# EAGLE board ESP32-Cam-Pico-V4 (EAGLE 9.6.2)
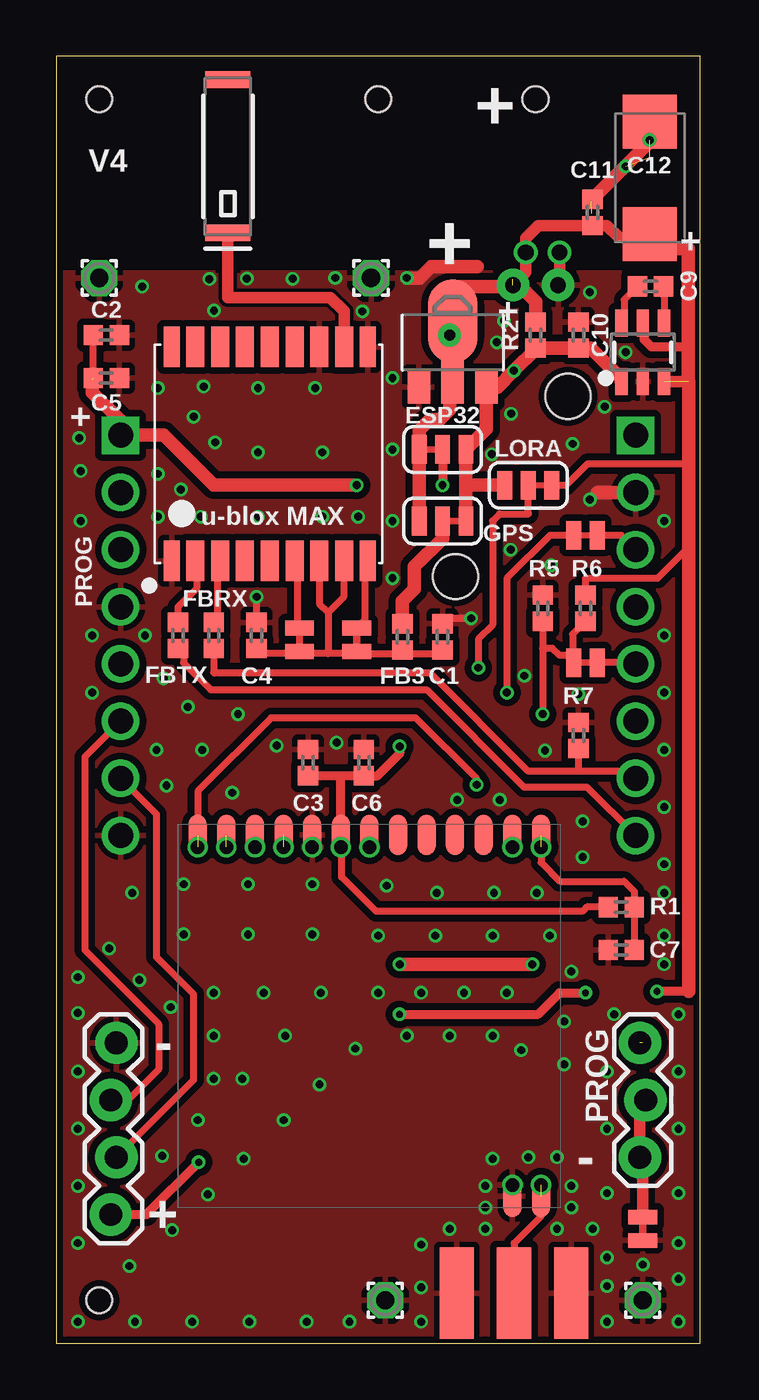
[diagram p0: board, top side]
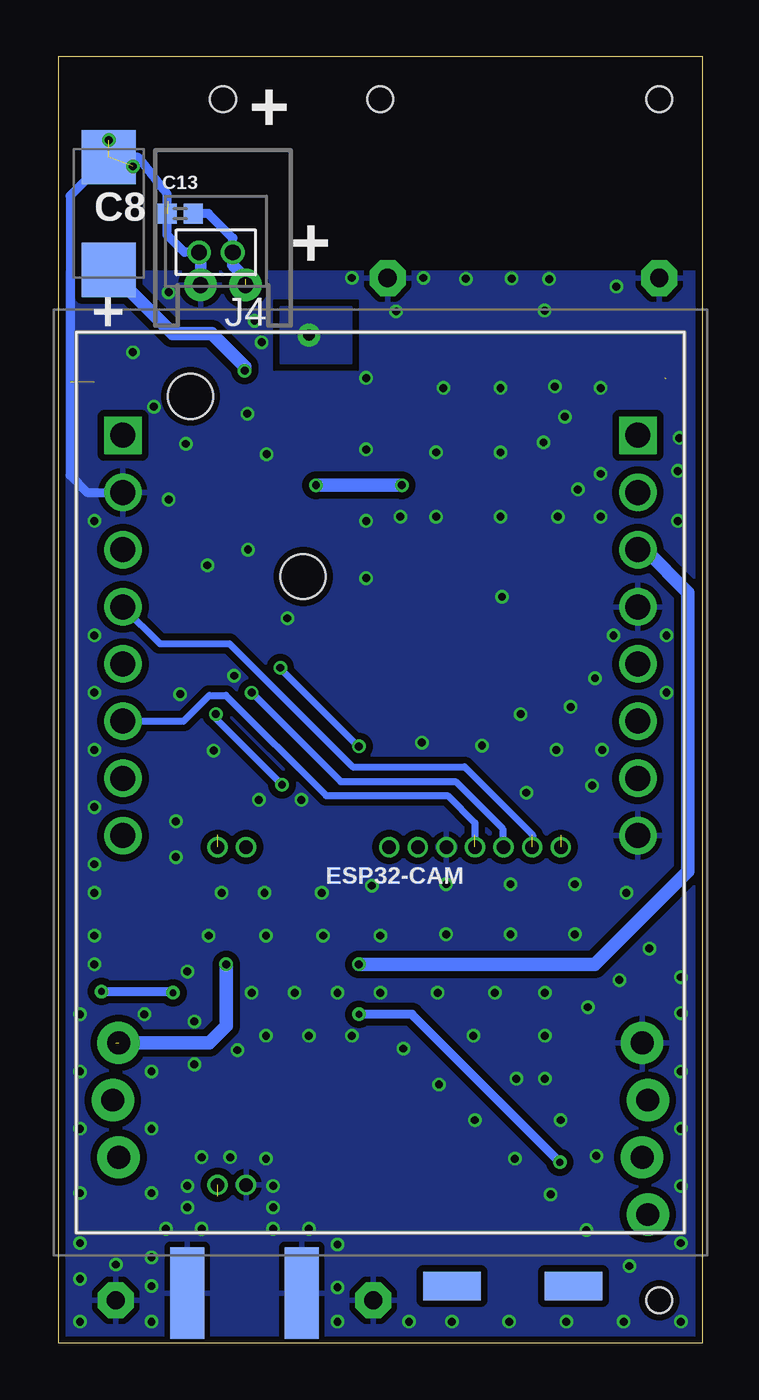
[diagram p1: board, bottom side, seen from below]

Size 28.57 x 57.15 mm. Coordinates in mm from the lower left corner, seen from the top.
Outline: 0,0 28.57,0 28.57,57.15 0,57.15 0,0
Copper layers (1*16): Top 0.035559375mm / dielectric 1.6mm / Bottom 0.035559375mm
Design rules "Arxterra-HLCpcb-2-layer-KW": minimum track width 6mil, minimum drill 0.3mm, track to track 6mil, track to pad 6mil, pad to pad 6mil, via to via 10mil, smd to smd 6mil, copper to edge 8mil, drill to drill 6mil, minimum pad ring 5mil, minimum via ring 3mil, stop-mask expansion 2.5mil, vias tented up to drill 25mil, thermal gap 10mil
Holes 1.15 mm at 1.91,55.24 14.29,55.24 1.91,1.91 21.27,55.24
tKeepout: area 0,47.9 to 28.6,57.5
bKeepout: area 0,47.9 to 28.6,57.5
tRestrict: area 0,47.9 to 28.6,57.5
bRestrict: area 0,47.9 to 28.6,57.5

## Footprints (pad centres in the part's own frame; a part is rotated, then mirrored left to right if it is on the bottom)
0402 = smd 0.85 x 0.9: 1 -0.58,0; 2 0.58,0
SMC_C = smd 2.4 x 2.4: + -2.5,0; - 2.5,0
SMT-JUMPER_3_1-NC_TRACE_SILK = smd 0.66 x 1.27: 1 -1.041,0; 2 0,0; 3 1.041,0
ESP32CAM = drill 1.11 pad 1.665: 1 0,0; 2 0,2.54; 3 0,5.08; 4 0,7.62; 5 0,10.16; 6 0,12.7; 7 0,15.24; 10 22.86,15.24; 11 22.86,12.7; 12 22.86,10.16; 13 22.86,7.62; 14 22.86,5.08; 15 22.86,2.54; 16 22.86,0 | drill 1.11 pad 1.665 square: 8 0,17.78; 9 22.86,17.78 | hole 2: 3,19.508; 8,11.508
SOT89 = smd 1 x 1.5: 1 -1.499,-1.981; 3 1.499,-1.981 | smd 1 x 2: 2 0,-1.727 | smd 2.2 x 3.7: 2@1 0,0.94
JST-2-PTH-KIT = drill 0.7 pad 1.448: 1 -1,0; 2 1,0
1X04_LOCK = drill 1.016 pad 1.88: 1 0,0.127; 2 2.54,-0.127; 3 5.08,0.127; 4 7.62,-0.127
1X03_LOCK = drill 1.016 pad 1.88: 1 0,0.127; 2 2.54,-0.127; 3 5.08,0.127
JST_ZH_2PIN = drill 0.7 pad 1: 1 -0.75,0.45; 2 0.75,0.45
SMA-EDGE = smd 1.524 x 4.064: GND@0 0,0; GND@1 5.08,0; SIG 2.54,0 | smd 1.524 x 4.064 bottom: GND@2 0,0; GND@3 5.08,0
SMT-JUMPER_2_NC_TRACE_NO-SILK = smd 0.66 x 1.27: 1 -0.521,0; 2 0.521,0
1,6/0,8 = drill 0.813 pad 1.6 octagon: 1 0,0
SMD1,27-2,54 = smd 1.27 x 2.54: 1 0,0
SOT23-6 = smd 0.55 x 1.2: 1 0.95,1.3; 2 0,1.3; 3 -0.95,1.3; 4 -0.95,-1.3; 5 0,-1.3; 6 0.95,-1.3
MAX-M8 = smd 1.8 x 0.7: 1_GND 4.95,-4.4; 9_RESET_N 4.95,4.3; 10_GND -4.55,4.3; 18_SAFEBOOT_N -4.55,-4.4 | smd 1.8 x 0.8: 2_TXD 4.95,-3.35; 3_RXD 4.95,-2.25; 4_TIMEPULSE 4.95,-1.15; 5_EXTINT 4.95,-0.05; 6_V_BCKP 4.95,1.05; 7_VCC_IO 4.95,2.15; 8_VCC 4.95,3.25; 11_RF_IN -4.55,3.25; 12_GND -4.55,2.15; 13_LNA_EN -4.55,1.05; 14_VCC_RF -4.55,-0.05; 15_V_ANT/RESERVED -4.55,-1.15; 16_SDA -4.55,-2.25; 17_SCL -4.55,-3.35
ANT-GPS-2X7MM = smd 0.75 x 2: 1 -3.4,0; NC 3.4,0
DRF1278F_2_LESS_PINS = drill 0.6 pad 0.85: 1 16.12,16; 2 14.85,16; 7 8.5,16; 8 7.23,16; 9 5.96,16; 10 4.69,16; 11 3.42,16; 12 2.15,16; 13 0.88,16; 14 14.85,1; 15 16.12,1 | smd 0.8 x 1.8: P1 16.12,16.53; P2 14.85,16.53; P3 13.57,16.53; P4 12.3,16.53; P5 11.04,16.53; P6 9.78,16.53; P7 8.5,16.53; P8 7.23,16.53; P9 5.96,16.53; P10 4.69,16.53; P11 3.42,16.53; P12 2.15,16.53; P13 0.88,16.53; P14 14.85,0.48; P15 16.12,0.48

## Placement (x,y rotation side)
C1  0.1uF  [0402]  17.14,31.37 90 top
C2  0.1uF  [0402]  2.22,44.77 0 top
C3  0.1uF  [0402]  11.18,25.78 90 top
C4  1.0uF  [0402]  8.89,31.43 90 top
C5  1.0uF  [0402]  2.22,42.86 0 top
C6  1.0uF  [0402]  13.65,25.78 90 top
C7  0.1uF  [0402]  25.08,17.46 180 top
C8  220uF  [SMC_C]  26.35,50.16 90 bottom
C9  4.7uF  [0402]  26.38,46.93 0 top
C10  4.7uF  [0402]  23.18,44.77 90 top
C11  4.7uF  [0402]  23.8,50.22 90 top
C12  220uF  [SMC_C]  26.35,51.75 90 top
C13  4.7uF  [0402]  23.18,50.16 180 bottom
ESP32  JUMPER-SMT_3_1-NC_TRACE_SILK  [SMT-JUMPER_3_1-NC_TRACE_SILK]  17.14,39.69 180 top
FB3  FERRITE_BEAD-120_OHM-0402  [0402]  15.37,31.37 90 top
FBRX  FERRITE_BEAD-120_OHM-0402  [0402]  6.99,31.43 270 top
FBTX  FERRITE_BEAD-120_OHM-0402  [0402]  5.4,31.43 270 top
GPS  JUMPER-SMT_3_1-NC_TRACE_SILK  [SMT-JUMPER_3_1-NC_TRACE_SILK]  17.14,36.51 0 top
IC1  ESP32-CAM  [ESP32CAM]  25.72,22.54 0 bottom
IC2  MCP170333MB  [SOT89]  17.6,44.45 0 top
J1  [JST-2-PTH-KIT]  21.27,46.99 0 bottom
J2  [1X04_LOCK]  2.54,13.34 270 top
J3  [1X03_LOCK]  26.04,8.26 90 top
J4  JST_ZH_2PIN  [JST_ZH_2PIN]  21.59,48.9 180 bottom
J$1  SMA_EDGE  [SMA-EDGE]  17.78,2.22 0 top
JP1  JUMPER-SMT_2_NC_TRACE_NO-SILK  [SMT-JUMPER_2_NC_TRACE_NO-SILK]  13.34,31.24 270 top
JP2  JUMPER-SMT_2_NC_TRACE_NO-SILK  [SMT-JUMPER_2_NC_TRACE_NO-SILK]  10.79,31.24 270 top
JP6  JUMPER-SMT_2_NC_TRACE_NO-SILK  [SMT-JUMPER_2_NC_TRACE_NO-SILK]  26.04,5.08 90 top
JP9  JUMPER-SMT_2_NC_TRACE_NO-SILK  [SMT-JUMPER_2_NC_TRACE_NO-SILK]  23.5,35.88 0 top
JP10  JUMPER-SMT_2_NC_TRACE_NO-SILK  [SMT-JUMPER_2_NC_TRACE_NO-SILK]  23.5,30.23 0 top
LORA  JUMPER-SMT_3_1-NC_TRACE_SILK  [SMT-JUMPER_3_1-NC_TRACE_SILK]  20.95,38.1 0 top
PAD1  [1,6/0,8]  1.91,47.31 0 top
PAD2  [1,6/0,8]  13.97,47.31 0 top
PAD3  [1,6/0,8]  14.61,1.91 0 top
PAD4  [1,6/0,8]  26.04,1.91 0 top
PAD5  [SMD1,27-2,54]  11.11,2.54 270 bottom
PAD6  [SMD1,27-2,54]  5.71,2.54 270 bottom
R1  10k  [0402]  25.08,19.37 180 top
R2  0k  [0402]  21.27,44.77 270 top
R5  22k  [0402]  21.59,32.64 270 top
R6  75k  [0402]  23.5,32.64 90 top
R7  22k  [0402]  23.18,26.99 270 top
U1  HX4002  [SOT23-6]  26.04,44.01 180 top
U$1  MAX-M8  [MAX-M8]  9.53,39.69 270 top
U$2  1.575GHz  [ANT-GPS-2X7MM]  7.62,52.7 90 top
U$3  DRF1278F_2LESS_PINS  [DRF1278F_2_LESS_PINS]  5.4,6.03 0 top

## Library data of the parts
C1-C3 C7 = SparkFun-Capacitors; PROD_ID: CAP-14993
C4-C6 C9-C11 C13 = SparkFun-Capacitors; PROD_ID: CAP-12417
C8 C12 = rcl; SPICEPREFIX: C
ESP32 GPS JP1 JP2 JP6 JP9 JP10 LORA = SparkFun-Jumpers
FB3 FBRX FBTX = SparkFun-Coils; MFG_PART: BLM15HB121SN1D; PROD_ID: NDUC-14206
IC1 = ESP32-CAM; DESCRIPTION: Modules PCBA Module RoHS; HEIGHT: 5mm; MANUFACTURER_NAME: Ai-Thinker; MANUFACTURER_PART_NUMBER: ESP32-CAM
IC2 = linear
J1 J3 = SparkFun-Connectors
J2 = SparkFun-Connectors; PROD_ID: CONN-09696
J4 = kanflo
J$1 = SparkFun-Retired
PAD1-PAD6 = wirepad
R1 R2 R5-R7 = SparkFun-Resistors; PROD_ID: RES-14241
U1 = KEW_HF_V13a
U$1 = ubloxLib
U$2 = SparkFun-GPS; PROD_ID: ANT-09087; SF_ID: GPS-09131
U$3 = DRF1278F

## Nets
3.3V: C8.+ C10.1 ESP32.1 GPS.3 IC2.3 LORA.1 R2.2 U1.1
ANT: J$1.SIG U$3.15 U$3.P15
GND: C1.2 C2.2 C3.2 C4.2 C5.2 C6.2 C7.2 C8.- C10.2 C11.2 C12.- C13.2 IC1.7 IC1.12 IC1.16 IC2.1 J1.1 J2.1 J4.2 J$1.GND@0 J$1.GND@1 J$1.GND@2 J$1.GND@3 JP6.1 PAD1.1 PAD2.1 PAD3.1 PAD4.1 R5.1 R7.1 U1.2 U$1.1_GND U$1.10_GND U$1.12_GND U$3.9 U$3.14 U$3.P9 U$3.P14
GPS_RXD: FBRX.2 IC1.2 R7.2
GPS_TXD: FBTX.2 IC1.1
MISO: JP9.1 U$3.11 U$3.P11
MOSI: IC1.5 U$3.12 U$3.P12
N$1: U$1.11_RF_IN U$2.1
N$2: FBRX.1 U$1.3_RXD
N$3: FBTX.1 U$1.2_TXD
N$5: JP1.1 U$1.9_RESET_N
N$6: JP2.1 U$1.6_V_BCKP
N$8: C7.1 R1.1 U$3.1 U$3.P1
N$9: FB3.2 GPS.2
N$11: C1.1 C4.1 FB3.1 JP1.2 JP2.2 U$1.7_VCC_IO U$1.8_VCC
N$12: C9.2 U1.4
N$15: J3.1 J3.2 JP6.2
N$17: C9.1 U1.6
N$18: IC1.6 JP9.2
N$20: IC1.4 JP10.2
NSS: JP10.1 R5.2 R6.1 U$3.13 U$3.P13
PROG: IC1.11 J3.3
RX: IC1.14 J2.2
S+: C3.1 C6.1 C11.1 C12.+ C13.1 ESP32.3 GPS.1 IC2.2@1 J1.2 J2.4 J4.1 LORA.2 LORA.3 R1.2 R2.1 R6.2 U1.3 U1.5 U$3.8 U$3.P8
SCK: IC1.3 U$3.10 U$3.P10
TX: IC1.15 J2.3
V: C2.1 C5.1 ESP32.2 IC1.9

## Tracks (layer width: path | path; a pad name or v marks a point on that pad's centre or on a via)
3.3V  (via drill 0.35 pad 0.6)
  Top 0.152: GPS.3 18.19,36.96
  Top 0.61: 23.18,44.15 C10.1 | U1.1 25.09,42.83 23.73,44.19 C10.1 | 18.19,38.1 ESP32.1 19.09,40.6 IC2.3 19.6,42.47 v20.31,43.19 21.27,44.15 R2.2 C10.1 | 18.19,36.96 18.19,38.1 | 18.19,38.1 LORA.1
  Bottom 0.61: v20.31,43.19 20.31,43.37 21.77,44.83 23.52,44.83 C8.+
ANT  (1 unrouted)
  Top 0.152: U$3.P15 21.52,6.35
  Top 0.305: 21.52,6.35 21.52,5.64 20.32,4.45 J$1.SIG
GND  (via drill 0.35 pad 0.6)  (3 unrouted)
  Top 0.305: C4.2 v8.89,33.15 | C1.2 17.39,32.19 v18.41,32.19
  Top 0.508: J1.1 22.34,47.06 J4.2
  Top 0.61: 24,37.78 IC1.7 | v15.56,47.31 16.13,47.31 16.64,47.82 18.69,47.82 | 23.72,50.72 C11.2 26.35,53.35 C12.-
  Bottom 0.406: IC1.7 27.3,37.78 28.07,38.54 28.07,50.95 C8.- 25.05,52.66 23.76,51.03 C13.2 23.76,49.21 22.99,48.45 J4.2
  Bottom 0.508: J4.2 22.27,48.38 J1.1
  other vias: 25.27,44.01 21.97,34.54 22.92,39.94 19.33,39.48 20.19,41.27 23.69,46.67 19.88,45.4 19.56,44.45 14.92,42.86 8.95,42.42 4.51,42.42 3.81,46.93 1.02,40.2 14.92,39.69 8.95,39.56 6.1,41.15 4.51,38.61 4.51,36.7 8.95,36.7 14.92,36.51 14.92,33.97 4.76,29.53 1.08,36.51 4.45,26.35 8.06,27.94 9.78,26.54 7.81,24.45 19.68,24.13 23.37,23.18 23.37,21.59 26.99,21.27 26.99,23.81 26.99,26.35 26.99,28.89 26.99,31.43 6.79,47.26 3.37,20 5.08,14.92 2.35,17.53 0.95,14.67 0.95,9.53 0.95,12.06 0.95,6.99 0.95,4.45 0.95,0.95 3.49,0.95 6.03,0.95 8.57,0.95 11.11,0.95 27.62,0.95 24.45,0.95 16.19,0.95 16.19,4.38 23.81,5.08 22.23,5.08 19.05,5.08 22.86,6.99 22.23,8.26 20.95,8.26 19.37,8.19 19.05,6.99 27.62,2.86 27.62,6.67 27.62,9.53 27.62,12.06 27.62,14.61 26.99,16.83 26.99,18.1 22.86,16.51 19.37,18.1 16.83,18.1 14.29,18.1 16.19,15.56 13.27,13.08 11.68,11.49 10.1,9.91 8.32,8.19 6.73,6.6 5.14,5.02 4.7,8.32 6.29,9.91 8.26,11.75 10.16,13.65 11.75,15.56 11.37,18.16 11.37,20.38 6.99,15.56 9.21,15.56 6.99,13.65 6.99,11.75 8.51,18.16 5.65,18.16 5.65,20.38 8.51,20.38 18.1,15.56 14.29,15.56 17.46,13.65 19.43,20 16.89,20 14.67,20.32 21.34,20 17.79,24.13 12.45,26.67 6.48,26.35 5.84,28.26 4.89,24.77 20.17,35.24 11.81,36.7 6.41,36.7 11.49,42.42 6.54,42.48 11.81,39.56 24.45,12.06 17.46,5.08 26.99,20 24.77,14.61 21.91,18.1 3.24,3.43 13.02,0.95 26.99,36.51 23.69,37.47 23.18,28.83 3.68,16.13 13.59,45.82 7,45.86 12.38,47.31 8.46,47.28 10.49,47.27 24.35,41.59 20.78,29.64 21.69,26.31 1.59,31.43 1.59,28.89 19.37,13.65 20,15.56 15.56,13.65 22.54,12.38 24.45,9.53 24.45,6.67 26.04,3.49 24.45,2.54 16.19,2.48 0.95,16.26 3.94,31.43 1.08,38.73 7.05,40.01 5.52,37.91 13.4,36.7 25.27,52.26 27.62,4.45 20.64,13.02 19.05,6.03 22.86,6.03 24.45,3.81 22.54,14.29 26.34,53.43
  pour Top (isolate 0.305, rank 2): 0,57.15 0,0 28.57,0 28.57,57.15
  pour Bottom (isolate 0.305, rank 2): 0,57.15 0,0 28.57,0 28.57,57.15
  pour Top: 5.21,47.5 7.24,45.47 14.48,45.47 12.45,47.5
GPS_RXD
  Top 0.305: FBRX.2 6.99,29.79 7.02,29.75 16.61,29.75 16.61,29.74 20.95,25.4 23.18,25.4 | IC1.2 25.4,25.4 23.18,25.4 | R7.2 23.18,25.4
GPS_TXD
  Top 0.305: FBTX.2 5.65,30.6 5.65,30.22 6.85,29.02 16.43,29.02 20.75,24.7 23.56,24.7 IC1.1
MISO  (via drill 0.35 pad 0.6)
  Top 0.152: U$3.P11 U$3.11
  Top 0.305: JP9.1 21.91,35.88 20,33.97 v20,28.89
  Bottom 0.305: v20,28.89 16.05,24.94 10.95,24.94 8.86,22.86 8.86,22.07 U$3.11
MOSI  (1 unrouted)
  Bottom 0.305: IC1.5 24.08,31.06 20.99,31.06 15.52,25.59 10.55,25.59 7.53,22.57 7.53,22.05 U$3.12
N$1
  Top 0.508: U$1.11_RF_IN 12.78,45.83 12.16,46.44 7.62,46.44 U$2.1
N$2
  Top 0.305: U$1.3_RXD 7.15,34.61 7.15,32.17 FBRX.1
N$3
  Top 0.305: U$1.2_TXD 6.22,34.69 6.22,33.52 5.4,32.69 FBTX.1
N$5
  Top 0.305: U$1.9_RESET_N 13.7,34.61 13.7,32.13 JP1.1
N$6
  Top 0.305: U$1.6_V_BCKP 10.7,34.61 10.7,31.86 JP2.1
N$8  (1 unrouted)
  Top 0.305: U$3.1 21.52,21.34 22.35,20.51 25.21,20.51 25.66,20.06 R1.1 C7.1
N$9
  Top 0.61: GPS.2 17.14,35.74 15.89,34.48 15.89,33.49 15.37,32.97 FB3.2
N$11
  Top 0.305: 12.06,30.62 10.9,30.62 JP2.2 10.7,30.62 9.12,30.62 C4.1 | 12.06,30.62 13.23,30.62 JP1.2 13.45,30.61 15.19,30.61 FB3.1 15.54,30.61 16.97,30.61 C1.1 | 12.06,32.44 11.68,32.83 U$1.7_VCC_IO | 12.06,32.44 12.06,30.62 | U$1.8_VCC 12.75,34.71 12.75,33.13 12.06,32.44
N$12
  Top 0.305: U1.4 26.98,46.49 26.96,46.52 C9.2
N$15
  Top 0.305: 26.05,5.62 JP6.2
  Top 0.508: JP6.2 26.04,8.13 J3.1 25.91,10.54 J3.2
N$17
  Top 0.305: U1.6 25.21,45.43 25.21,46.34 C9.1
N$18
  Top 0.305: IC1.6 25.08,35.88 JP9.2
N$20
  Top 0.305: JP10.2 25.65,30.23 IC1.4
NSS  (via drill 0.35 pad 0.6)  (1 unrouted)
  Top 0.305: R6.1 22.92,31.49 22.92,30.28 JP10.1 22.66,30.54 22.34,30.54 22.02,30.86 21.59,30.86 | 21.59,30.86 v21.59,27.94 | R5.2 21.59,30.86 | U$3.P13 6.28,24.52 9.54,27.77 15.95,27.77 18.66,25.07 v18.66,24.8
  Bottom 0.305: v21.59,27.94 21.59,27.74 v18.66,24.8
PROG  (via drill 0.35 pad 0.6)  (1 unrouted)
  Top 0.61: v21.13,16.83 v15.24,16.83
  Bottom 0.61: IC1.11 2.54,35.24 0.64,33.34 0.64,20.95 4.76,16.83 v15.24,16.83 | 26.04,13.34 21.89,13.34 21.13,14.1 v21.13,16.83
RX
  Top 0.305: IC1.14 1.27,26.04 1.27,17.46 4.55,14.19 4.55,12.17 3.17,10.79 J2.2
S+  (via drill 0.3 pad 0.6, 0.35 pad 0.6, 0.5 pad 1)  (2 unrouted)
  Top 0.152: U$3.P8 12.67,22.52 12.67,21.99 | ESP32.3 | LORA.2 LORA.3
  Top 0.305: C3.1 11.18,24.93 | 12.63,25.2 C6.1 | U1.5 26.09,45.25 | R6.2 23.5,33.98 26.7,33.98 28.06,35.35 | LORA.3 22.63,38.1 23.58,39.05 28.06,39.05 | LORA.2 20.95,36.83 19.68,36.83 19.37,36.51 19.37,31.9 18.73,31.27 v18.73,30 | U$3.8 12.67,21.99 12.67,20.7 14.2,19.18 23.36,19.18 23.55,19.37 R1.2
  Top 0.406: C3.1 C6.1 14.25,25.2 15.24,26.19 v15.24,26.5 | 26.09,45.25 26.09,44.58 26.41,44.25 28.06,44.25 | U$3.P8 12.63,25.2 | v6.32,8.04 4,5.71 J2.4 | v15.24,14.61 21.39,14.61 22.34,15.56 v23.5,15.56 | 28.06,15.62 v26.67,15.62
  Top 0.508: U1.3 28.06,42.7 | 26.19,49.09 24.98,49.09 24.43,49.64 C11.1 21.4,49.64 20.84,49.08 J4.1 20.84,47.56 J1.2
  Top 0.61: 28.06,42.7 28.06,44.25 28.06,48.62 26.99,48.62 C12.+ 26.19,49.09 | ESP32.3 GPS.1 | ESP32.3 16.1,40.55 16.57,41.02 17.02,41.02 17.46,41.47 v17.46,44.77 17.6,44.9 IC2.2@1 17.6,46.93 20.21,46.93 J1.2 | 28.06,42.7 28.06,39.05 28.06,35.35 28.06,15.62 | 20.27,47.24 21.27,46.24 R2.1
  Bottom 0.305: v18.73,30 18.73,29.97 15.27,26.5 v15.24,26.5
  Bottom 0.406: v6.32,8.04 12.89,14.61 v15.24,14.61 | v23.5,15.56 23.56,15.62 v26.67,15.62 | J4.1 20.84,49.08 21.93,50.16 C13.1
  Bottom 0.508: J4.1 20.84,47.88 20.27,47.31 J1.2
  pour Bottom (isolate 0.305): 18.73,46.04 18.73,43.5 15.56,43.5 15.56,46.04
SCK  (1 unrouted)
  Bottom 0.305: U$3.10 10.09,23.11 11.3,24.32 16.7,24.32 21.14,28.77 21.88,28.77 23.02,27.62 IC1.3
TX
  Top 0.305: J2.3 6.1,11.68 6.1,15.49 4.45,17.14 4.45,23.5 IC1.15
V  (via drill 0.35 pad 0.6)  (1 unrouted)
  Top 0.305: C5.1 C2.1
  Top 0.406: ESP32.2 v17.14,38.1
  Top 0.61: 1.6,42.82 1.6,42.22 2.86,40.97 IC1.9 4.76,40.32 6.99,38.1 v13.34,38.1
  Bottom 0.61: v17.14,38.1 v13.34,38.1

## Text on the board
tNames: + | V4 | + | + | + | + | PROG | PROG | - | - | +
bNames: + | + | +